# Altium PCB BC5+SIM02.PcbDoc
Units mil, origin at the board's own origin, x right, y up, seen from the top; angles counter-clockwise.
Board outline 1278 x 1625 mil, 2 copper layers (Top Layer, Bottom Layer); 28 components, 20 nets, 162 pads, 245 vias.
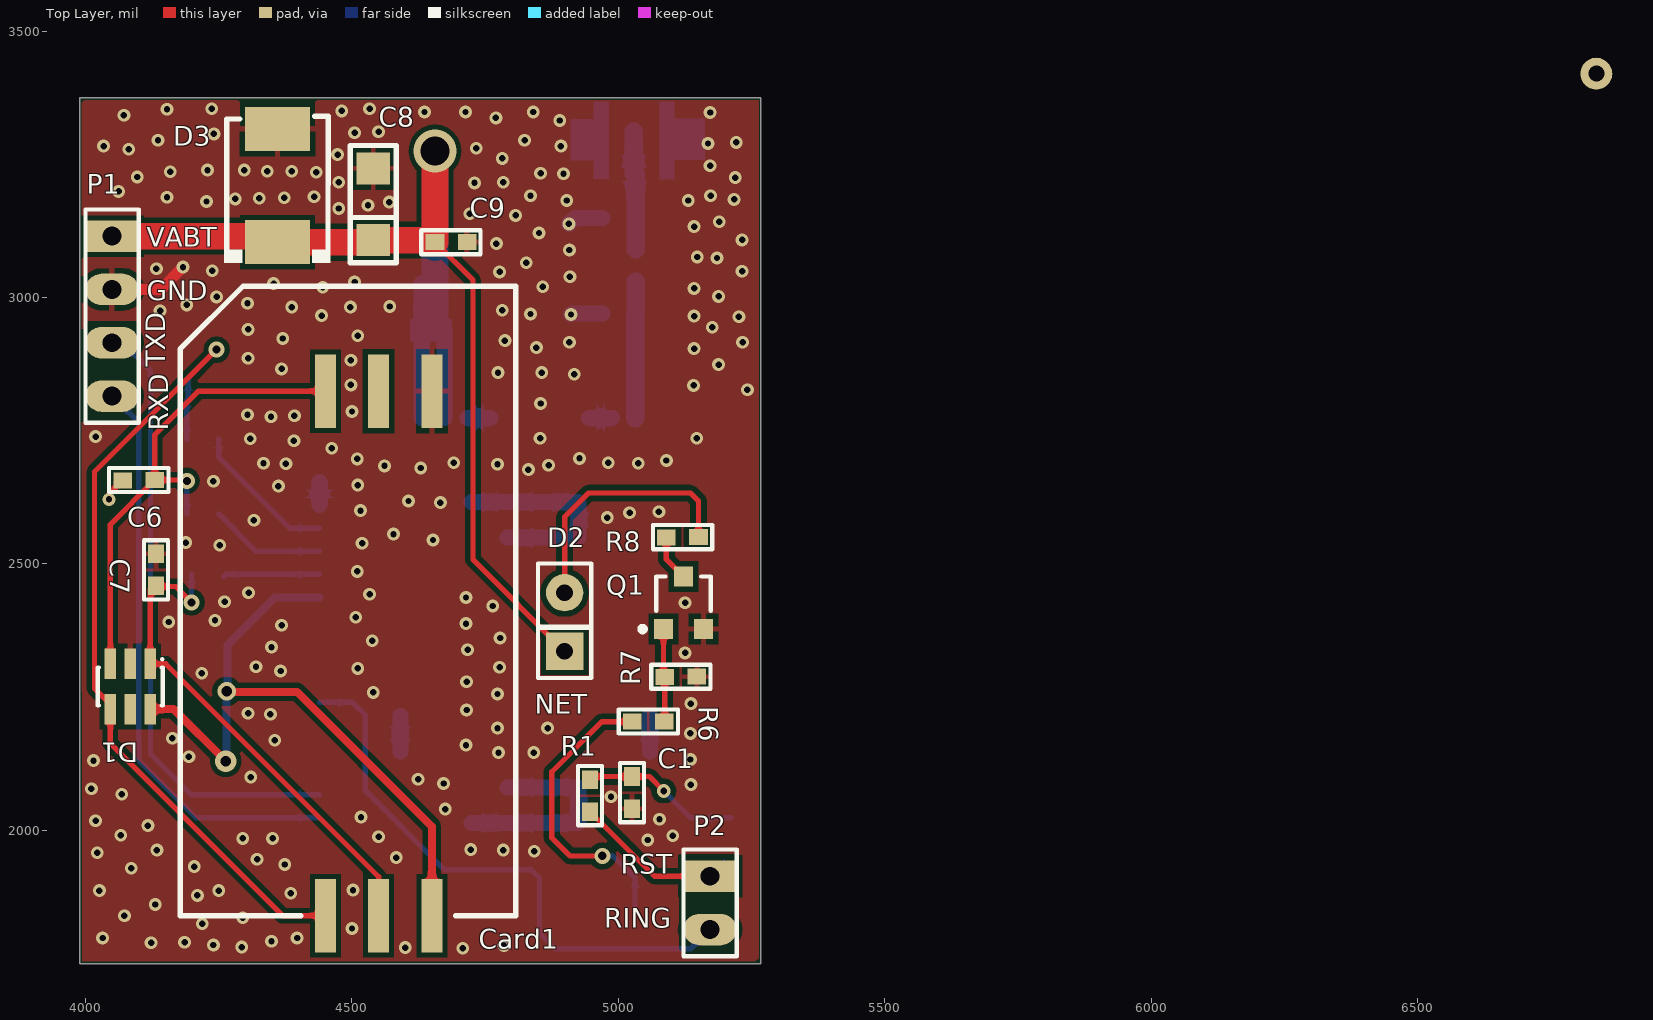
[diagram p0: Top Layer view]
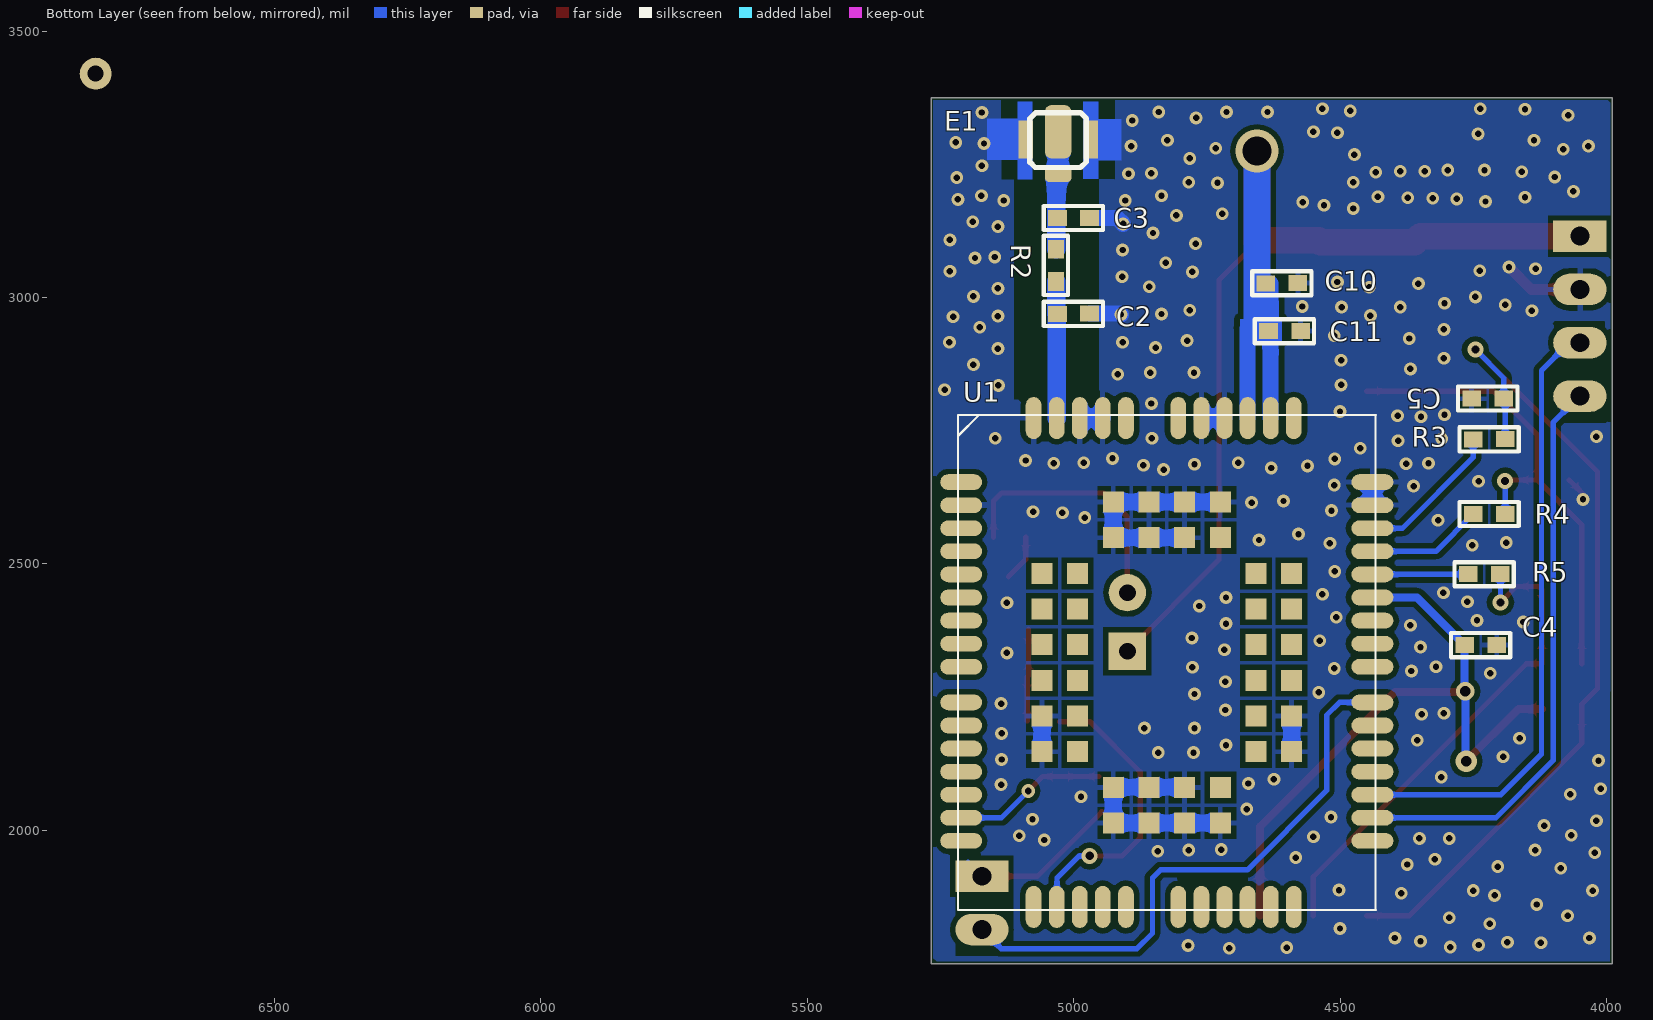
[diagram p1: Bottom Layer view, seen from below]

## Layer stack, top to bottom
Top Solder: solder mask 0.4, Solder Resist, Dk 3.5
Top Layer: signal copper 1.4
Dielectric 1: dielectric 12.6, FR-4, Dk 4.8
Bottom Layer: signal copper 1.4
Bottom Solder: solder mask 0.4, Solder Resist, Dk 3.5

## Board outline
3989,1750 3989,3375 5267,3375 5267,1750

## Design rules (kind name [scope] priority, off if disabled: settings)
Clearance [All] p1: gap=10
PolygonConnect [All] p1: connectstyle=Relief reliefconductorwidth=10 reliefentries=4 polygonreliefangle="90 Angle" airgapwidth=10
RoutingVias [All] p1: holewidth=28 width=50 viastyle="Through Hole" minholewidth=1 minwidth=0 maxholewidth=100 maxwidth=100
SolderMaskExpansion [All] p1: expansion=4
Width [All] p1: maxlimit=100 minlimit=10 preferedwidth=10
30 further rules are at their usual default settings.

## Components (designator, comment, footprint, x,y, rotation, side; value= is the part's Value field where it differs from the comment)
C1 "0.1uF" 0603 5024,2061 r90 top
C2 "缺省" 0603 5010,2970.57 r180 bottom
C3 "缺省" 0603 5010,3150.57 r180 bottom
C4 "100nF" 0603 4246,2349 r180 bottom
C5 "33pF" 0603 4213,2809 r0 bottom
C6 "33pF" 0603 4109.57,2656 r180 top
C7 "33pF" 0603 4131,2479 r90 top
C8 "100uF" 1206 4540,3175 r90 top
C9 "100nF" 0603 4676,3105 r0 top
C10 "100pF" 0603 4619,3028 r180 bottom
C11 "22pF" 0603 4614,2938 r180 bottom
Card1 "Card" SIM 4650,1840 r90 top
D1 "SRV05-4" SOT23-6 4084,2270 r180 top
D2 "LED BLUE" LED-3mm 4899,2336 r90 top
D3 "D Zener" DO-214AB 4360,3210 r90 top
E1 "Antenna" IPX 5029,3295.57 r180 bottom
P1 "Header 4" HDR1X4 4050,3115 r270 top
P2 "Header 2" HDR1X2 5172,1914 r270 top
Q1 "9013" SOT-23 5122,2427 r0 top
R1 "1K" 0603 4948,2075 r270 top
R2 "0" 0603 5032,3070 r270 bottom
R3 "22R" 0603 4230,2735 r180 bottom
R4 "22R" 0603 4230,2595 r180 bottom
R5 "22R" 0603 4239.43,2482 r180 bottom
R6 "Res2" 0603 5066,2203 r180 top
R7 "Res2" 0603 5127,2287 r180 top
R8 "Res2" 0603 5130,2549 r180 top
U1 "BC95" BC95 4825,2315 r180 bottom

## Footprints (in the part's own frame and the unit in brackets; to place one, negate y for a bottom-side part, rotate by r counter-clockwise, add the part's x,y. Pads: shape width x height; smd on the part's side, far side on the other; paste and mask are expansions set on the pad)
0603 [mil] "0603"
  rect 35x30 smd: 1(40,-1) 2(-20.23,-1.34)
  silkscreen extent -46,-24 65,21
1206 [mm]
  rect 1.52x1.6 smd: 1(-1.71,0) 2(1.71,0)
  silkscreen extent -2.79,-1.1 2.79,1.1
BC95 [mm]
  oval 2x0.75 smd: 1(-9.8,8.6) 2(-9.8,7.5) 3(-9.8,6.4) 4(-9.8,5.3) 5(-9.8,4.2) 6(-9.8,3.1) 7(-9.8,2) 8(-9.8,0.9) 9(-9.8,-0.2) 10(-9.8,-1.9) 11(-9.8,-3) 12(-9.8,-4.1) 13(-9.8,-5.2) 14(-9.8,-6.3) 15(-9.8,-7.4) 16(-9.8,-8.5) 28(9.8,-8.5) 29(9.8,-7.4) 30(9.8,-6.3) 31(9.8,-5.2) 32(9.8,-4.1) 33(9.8,-3) 34(9.8,-1.9) 35(9.8,-0.2) 36(9.8,0.9) 37(9.8,2) 38(9.8,3.1) 39(9.8,4.2) 40(9.8,5.3) 41(9.8,6.4) 42(9.8,7.5) 43(9.8,8.6)
  oval 0.75x2 smd: 17(-6.35,-11.65) 18(-5.25,-11.65) 19(-4.15,-11.65) 20(-3.05,-11.65) 21(-1.95,-11.65) 22(0.55,-11.65) 23(1.65,-11.65) 24(2.75,-11.65) 25(3.85,-11.65) 26(4.95,-11.65) 27(6.05,-11.65) 44(6.05,11.65) 45(4.95,11.65) 46(3.85,11.65) 47(2.75,11.65) 48(1.65,11.65) 49(0.55,11.65) 50(-1.95,11.65) 51(-3.05,11.65) 52(-4.15,11.65) 53(-5.25,11.65) 54(-6.35,11.65)
  rect 1x1 smd: 55(-5.95,4.25) 56(-5.95,2.55) 57(-5.95,0.85) 58(-5.95,-0.85) 59(-5.95,-2.55) 60(-5.95,-4.25) 61(-2.55,-7.65) 62(-0.85,-7.65) 63(0.85,-7.65) 64(2.55,-7.65) 65(5.95,-4.25) 66(5.95,-2.55) 67(5.95,-0.85) 68(5.95,0.85) 69(5.95,2.55) 70(5.95,4.25) 71(2.55,7.65) 72(0.85,7.65) 73(-0.85,7.65) 74(-2.55,7.65) 75(-4.25,4.25) 76(-4.25,2.55) 77(-4.25,0.85) 78(-4.25,-0.85) 79(-4.25,-2.55) 80(-4.25,-4.25) 81(-2.55,-5.95) 82(-0.85,-5.95) 83(0.85,-5.95) 84(2.55,-5.95) 85(4.25,-4.25) 86(4.25,-2.55) 87(4.25,-0.85) 88(4.25,0.85) 89(4.25,2.55) 90(4.25,4.25) 91(2.55,5.95) 92(0.85,5.95) 93(-0.85,5.95) 94(-2.55,5.95)
  silkscreen extent -9.96,-11.8 9.96,11.8
DO-214AB [mm]
  rect 2.1x3.1 smd: 1(2.7,0) 2(-2.7,0)
  silkscreen extent -3.68,-2.54 3.3,2.54
HDR1X2 [mm] "Connector; Header; 2 Position"
  rect 1.5x2.54 hole 0.9: 1(0,0)
  oval 1.5x2.54 hole 0.9: 2(2.54,0)
  silkscreen extent -1.27,-1.27 3.81,1.27
HDR1X4 [mm] "Connector; Header; 4 Position"
  rect 1.5x2.54 hole 0.9: 1(0,0)
  oval 1.5x2.54 hole 0.9: 2(2.54,0) 3(5.08,0) 4(7.62,0)
  silkscreen extent -1.27,-1.27 8.89,1.27
IPX [mil]
  rrect50% 50x31.5 smd: 1(0,-63)
  rect 27.56x70.87 smd: 2(61,1) 4(-61,1)
  silkscreen extent -53,-52 53,51
LED-3mm [mil] "Connector; Header; 5 Position"
  rect 70x70 hole 31.5: 1(0,0)
  round 70 hole 31.5: 2(110,0)
  silkscreen extent -50,-50 165,50
SIM [mm]
  rect 3.5x1 smd: 1(0,0) 2(0,2.54) 3(0,5.08) 4(25,0) 5(25,2.54) 6(25,5.08)
  silkscreen extent 0,-4 30,12
SOT23-6 [mm] "SOT-23/SC-74A; 5 Leads; Body 3.1 x 3 mm, inc. leads (LxW max)"
  rect 0.55x1.45 smd: 1(-0.95,-1.075) 2(0,-1.075) 3(0.95,-1.075) 4(0.95,1.075) 5(0,1.075) 6(-0.95,1.075)
  silkscreen extent -1.58,-1.35 1.55,0.9
SOT-23 [mm] "SOT-23; 3 Leads; Body 3.0 x 2.6 mm, inc. leads (LxW max)"
  rect 0.9x0.95 smd: 1(-0.95,-1.25) 2(0.95,-1.25) 3(0,1.25)
  silkscreen extent -2.07,-1.37 1.3,1.25

## Part data
C1 C2 C3 C4 C5 C6 C7 C9 C10 C11: library part Cap, "Capacitor"
C8: library part "Cap Pol1", "插件 电解电容 13*21"
D1: library part SMF05C, "SOT363"
D2: library part LED0, "插件 发光二极管 5mm 红发红光"
D3: "Zener Diode"
E1: "Generic Antenna"
P1: "Header, 4-Pin"
P2: "Header, 2-Pin"
Q1: library part NPN, "贴片三极管MMBT5551 SOT-23"
R1 R2: library part Res2, "Resistor"
R3 R4 R5: library part Resistor, "贴片电阻 0603"
R6 R7 R8: "Resistor"

## Free pads (board coordinates)
  rrect50% 50x100 smd far side: 1(5029,3311)
  round 60 hole 30: 2(6835,3420)

## Via types
v1: diameter 24, hole 12, Top Layer to Bottom Layer, 237 vias
v2: diameter 30, hole 15, Top Layer to Bottom Layer, 3 vias
v3: diameter 30, hole 16, Top Layer to Bottom Layer, 1 vias
v4: diameter 26, hole 13, Top Layer to Bottom Layer, 1 vias
v5: diameter 35, hole 20, Top Layer to Bottom Layer, 1 vias
v6: diameter 80, hole 55, Top Layer to Bottom Layer, 1 vias
v7: diameter 40, hole 20, Top Layer to Bottom Layer, 1 vias

## Nets (pads, with @x,y where several pads share a name; then routed paths per layer and width w, separated by ;. In a path a pad name is that pad's centre, name@x,y a point inside that pad or via, vN(x,y) a via of type N, cw(c..) or ccw(c..) an arc to the next point about the centre after c; other vN are vias at no path point)
GND: C1.2 C2.1 C3.1 C4.1 C5.1 C6.1 C7.1 C8.2 C9.1 C10.1 C11.1 Card1.4 D1.2 D3.1 E1.2 E1.4 P1.2 Q1.2 R7.2 U1.2 U1.42 U1.43 U1.47 U1.48 U1.51 U1.52 U1.54 U1.59 U1.60 U1.61 U1.62 U1.63 U1.64 U1.65 U1.66 U1.71 U1.72 U1.73 U1.74 U1.81 U1.82 U1.83 U1.92 U1.93 U1.94 | length 1391.4
  Top Layer w10: v1(4044,2621) 4044,2631.43 C6.1
  Top Layer w20: P1.2 4141,3015 v1(4183,3057)
  Bottom Layer w30: U1.42 U1.43 ; U1.65 U1.66 ; U1.47 U1.48 ; U1.64 U1.63 U1.62 U1.61 U1.81 U1.82 U1.83 ; U1.71 U1.72 U1.73 U1.74 U1.94 U1.93 U1.92 ; v1(4907,3138) 4918.57,3149.57 C3.1 ; v1(4911,2968) 4912.57,2969.57 C2.1 ; U1.51 U1.52 ; U1.60 U1.59
  other v1: 4708,1779 4600,1780 4293,1781 4785,1784 4240,1785 4123,1789 4186,1790 4349,1792 4032,1798 4397,1798 4500,1816 4219,1825 4295,1836 4073,1840 4131,1861 4210,1878 4385,1882 4026,1887 4250,1887 4502,1888 4086,1929 4204,1932 4374,1936 4322,1946 4583,1949 4022,1958 4842,1961 4134,1963 4784,1963 4723,1964 5055,1982 4295,1985 4351,1985 4550,1988 5102,1990 4066,1991 4117,2009 4019,2018 5077,2021 4517,2025 4675,2040 4986,2063 4068,2068 4011,2078 5136,2086 4672,2088 4624,2096 4310,2100 4015,2131 5135,2133 4194,2138 4775,2146 4841,2146 4714,2160 4355,2169 4163,2173 5135,2182 4773,2192 4867,2192 4347,2218 4305,2220 4715,2226 5136,2238 4773,2256 4540,2259 4715,2279 4218,2295 4366,2299 4511,2304 4777,2306 4320,2307 5125,2333 4717,2339 4349,2344 4538,2356 4778,2361 4368,2385 4714,2388 4156,2391 4243,2394 4507,2400 4764,2421 5125,2427 4261,2429 4714,2437 4533,2443 4306,2446 4510,2486 4252,2535 4519,2539 4188,2540 4652,2545 4578,2556 4316,2582 4979,2587 5021,2596 5076,2598 4516,2600 4666,2615 4606,2618 4362,2646 4511,2648 4240,2655 4831,2677 4629,2680 4561,2684 4869,2685 4773,2687 4376,2688 4334,2689 5037,2689 4691,2690 4981,2690 5090,2694 4510,2697 4927,2698 4462,2717 4391,2731 4309,2735 4853,2736 5147,2736 4019,2739 4348,2776 4392,2778 4304,2780 4500,2786 4854,2801 5242,2827 5141,2835 4498,2836 4917,2856 4774,2859 4856,2859 4368,2866 5188,2874 4498,2882 4305,2886 5142,2904 4846,2906 4908,2916 5233,2916 4787,2919 4370,2923 4511,2928 4305,2940 5176,2944 5226,2964 5142,2965 4443,2966 4835,2969 4140,2975 4782,2976 4387,2982 4497,2982 4571,2983 4190,2986 4304,2989 4246,3001 5188,3002 5142,3017 4445,3019 4858,3020 4353,3026 4505,3029 4909,3039 4777,3048 5232,3049 4238,3050 4133,3054 4827,3065 5185,3074 5148,3076 4908,3089 4771,3101 5232,3108 4851,3121 5142,3133 5189,3142 4807,3154 4721,3157 4475,3167 4530,3173 4570,3179 4227,3180 4903,3182 5131,3182 5217,3184 4281,3185 4326,3186 4373,3187 4153,3188 4429,3189 4835,3191 5173,3191 4062,3199 4730,3215 4475,3216 4784,3216 5219,3225 4097,3226 4897,3232 4854,3233 4433,3235 4159,3236 4341,3237 4387,3237 4229,3239 4298,3239 5172,3247 4782,3261 4473,3268 4081,3278 4733,3280 4034,3284 4892,3284 5168,3289 5221,3291 4136,3295 4824,3295 4241,3307 4505,3309 4550,3311 4890,3332 4770,3337 4072,3342 5172,3347 4636,3348 4713,3348 4840,3348 4481,3350 4153,3353 4237,3354 4533,3354
NetC1_1: C1.1 R1.2 U1.15 | length 290.4
  Top Layer w10: R1.2@4952.43,2101 C1.1 5058,2101 v4(5085,2074)
  Bottom Layer w10: v4(5085,2074) 5135.34,2023.66 U1.15
NetC3_2: C3.2 E1.1 pad.1 R2.2 | length 220.8
  Bottom Layer w31.5: E1.1 E1.1@5029.23,3232.34
  Bottom Layer w35: E1.1 pad.1 ; C3.2@5032.23,3149.23 E1.1@5032.23,3232.34 ; R2.2@5032.34,3090.23 C3.2@5032.34,3149.12
NetC5_2: C5.2 Card1.3 D1.4 R3.1 | length 1574.3
  Top Layer w10: v2(4246,2902) 4017,2673 4017,2266 4046.6,2236.4 D1.4 4046.6,2163.4 4370,1840 Card1.3
  Bottom Layer w10: R3.1 4190,2807.57 C5.2 4192.77,2848.77 v2(4246,2902)
NetC6_2: C6.2 Card1.6 D1.3 R4.1 | length 942.5
  Top Layer w10: D1.3 4046.6,2574.14 C6.2 ; v2(4190,2656) 4188.66,2657.34 C6.2 ; Card1.6 4212.25,2824.25 4129.8,2741.8 C6.2
  Bottom Layer w10: v2@4189,2657 v2(4190,2656) R4.1
NetC7_2: C7.2 Card1.2 D1.1 R5.1 | length 952
  Top Layer w10: D1.1 D1.1@4121.4,2312.49 ; v2(4199,2428) 4169.32,2457.68 4127.46,2457.68 4121.4,2451.62 D1.1@4121.4,2312.49 ; Card1.2 4550,1913 4150.51,2312.49 D1.1@4121.4,2312.49
  Bottom Layer w10: v2(4199,2428) 4199,2480.57 R5.1
NetD2_2: D2.2 R8.2 | length 485.6
  Top Layer w10: D2.2 4899,2588 4944,2633 5135,2633 5150.23,2617.77 R8.2
NETLIGHT: R6.1 U1.18 | length 556.4
  Top Layer w10: v3(4970,1952) 4909,1952 4875,1986 4875,2110 4969,2204 R6.1
  Bottom Layer w10: v3(4970,1952) 4990,1952 5031,1911 U1.18@5031,1855.65
NetQ1_1: Q1.1 R6.2 R7.1 | length 173.2
  Top Layer w10: Q1.1 5084.6,2290.4 R7.1 5087,2205.89 R6.2@5086.77,2205.66
NetQ1_3: Q1.3 R8.1 | length 87
  Top Layer w10: R8.1 5090,2508.21 Q1.3
REST: P2.1 R1.1 | length 311.9
  Top Layer w10: R1.1 5068,1914 P2.1
  Bottom Layer w10: P2.1 P2.1@5198,1940
RF_ANT: C2.2 R2.1 U1.53 | length 253.7
  Bottom Layer w35: U1.53 C2.2@5031.69,2966.77 ; C2.2@5032.23,2969.23 R2.1@5032.23,3029.8
RING: P2.2 U1.34 | length 1082.7
  Bottom Layer w10: U1.34 4500.8,2240.2 4525,2216 4525,2075 4674,1926 4837,1926 4852,1911 4852,1807 4881,1778 5136,1778 P2.2
RXD: P1.4 U1.29 | length 1088.3
  Bottom Layer w10: P1.4 4100,2765 4100,2131 4207.34,2023.66 U1.29
TXD: P1.3 U1.30 | length 1162.2
  Bottom Layer w10: P1.3 4070,2915 4122,2863 4122,2143 4198.03,2066.97 U1.30
USIM_CLK: R3.2 U1.41 | length 277.8
  Bottom Layer w10: R3.2 4250.23,2699.77 4383.03,2566.97 U1.41
USIM_DATA: R4.2 U1.40 | length 217.9
  Bottom Layer w10: R4.2 4320.23,2523.66 U1.40
USIM_RST: R5.2 U1.39 | length 181.9
  Bottom Layer w10: R5.2@4259.23,2475.66 4263.92,2480.35 U1.39
USIM_VDD: C4.2 Card1.1 D1.6 U1.38 | length 1268.2
  Top Layer w15: D1.6 4165.32,2227.68 v7(4263,2130) ; v5(4265,2261) 4266,2260 4397,2260 4650,2007 Card1.1
  Bottom Layer w15: v7(4263,2130) 4265,2132 v5(4265,2261) 4266.23,2262.23 C4.2 4355.62,2437.05 U1.38
VBAT: C8.1 C9.2 C10.2 C11.2 D2.1 D3.2 P1.1 U1.45 U1.46 | length 2421.3
  Top Layer w10: C9.2 4727,3032.43 4727,2508 D2.1
  Top Layer w50: P1.1 4348.7,3115 D3.2 4536.02,3103.7 C8.1 4651.75,3107.68 C9.2 v6(4655.77,3274.77) v6@4656,3275
  Bottom Layer w30: U1.45 C10.2@4630.12,3025.77 ; U1.46 4673.43,2941.43 4674,2942
  Bottom Layer w50: C11.2 4655.77,2958.2 v6(4655.77,3274.77)
pads on no net: Card1.5 D1.5 U1.1 U1.3 U1.4 U1.5 U1.6 U1.7 U1.8 U1.9 U1.10 U1.11 U1.12 U1.13 U1.14 U1.16 U1.17 U1.19 U1.20 U1.21 U1.22 U1.23 U1.24 U1.25 U1.26 U1.27 U1.28 U1.31 U1.32 U1.33 U1.35 U1.36 U1.37 U1.44 U1.49 U1.50 U1.55 U1.56 U1.57 U1.58 U1.67 U1.68 U1.69 U1.70 U1.75 U1.76 U1.77 U1.78 U1.79 U1.80 U1.84 U1.85 U1.86 U1.87 U1.88 U1.89 U1.90 U1.91

## Polygon pours and split planes (outlines as drawn)
GND on Top Layer "GND_L01_P012" (solid, pour order 12): 3993,3371 3994,3370 5263,3370 5263,1760 5257,1754 3994,1754
GND on Bottom Layer "GND_L02_P014" (solid, pour order 14): 3993,3371 3994,3370 5263,3370 5263,1760 5257,1754 3994,1754

## Other copper
Top Layer:
  pour cut-out: 5113.74,1955 5113.74,1777.47 5125.74,1765.47 5223.74,1765.47 5223.74,1956.47 5222.74,1957.47 5220.26,1955
  pour cut-out: 4097,2956 4102,2951 4098,2947 4098,2764 4001,2764 3998,2767 4002,2771 4002,2954 4004,2956
Bottom Layer:
  rectangle net GND: 5090,3257.57 5162,3335.57
  rectangle net GND: 4910,3257 4982,3335
  rectangle net GND: 4953,3222 4982,3368
  rectangle net GND: 5077,3221 5105,3368
  rectangle net VBAT: 4609,2917 4688,2960
  pour cut-out: 5112,1953.53 5112,1776 5124,1764 5222,1764 5222,1955 5221,1956 5218.53,1953.53
  pour cut-out: 4097,2956 4102,2951 4098,2947 4098,2764 4001,2764 3998,2767 4002,2771 4002,2954 4004,2956
  pour cut-out: 5137,3372 5136,3373 5105,3373 5105,3221 5106,3220 5107,3221 5136,3221
  pour cut-out: 4953.5,3373 4952.5,3374 4921.5,3374 4921.5,3222 4922.5,3221 4923.5,3222 4952.5,3222
  pour cut-out: 5077,3364 5076,3365 5076,3374 5108,3374 5105,3371 5105,3364
  pour cut-out: 4953.5,3365 4953.5,3373 4981.5,3373 4982.5,3374 4982.5,3365
  pour cut-out: 5049.5,2808 5049.5,3221 5112.5,3221 5112.5,2808
  pour cut-out: 4952,2808 4952,3222 5015,3222 5015,2808
  pour cut-out: 5010,2808 5010,2730 5011,2729 5055,2729 5055,2806 5053,2808
  pour cut-out: 4987,3217 4982,3222 4982,3374 5076,3374 5078,3372 5077,3371 5077,3221 5073,3217

## Silkscreen, mask and mechanical layers (free items; w line width, h text height)
Top Overlay:
  text "VABT" at 4115,3095 h36
  text "GND" at 4115,2995 h36
  text "TXD" at 4150,2870 h36 r90
  text "RXD" at 4155,2750 h36 r90
  text "NET" at 4843,2219 h36
  text "RST" at 5004,1919 h36
  text "RING" at 4973,1817 h36
Mechanical 1:
  the board outline again, w5